# EAGLE board GEMINI (EAGLE 9.4.2)
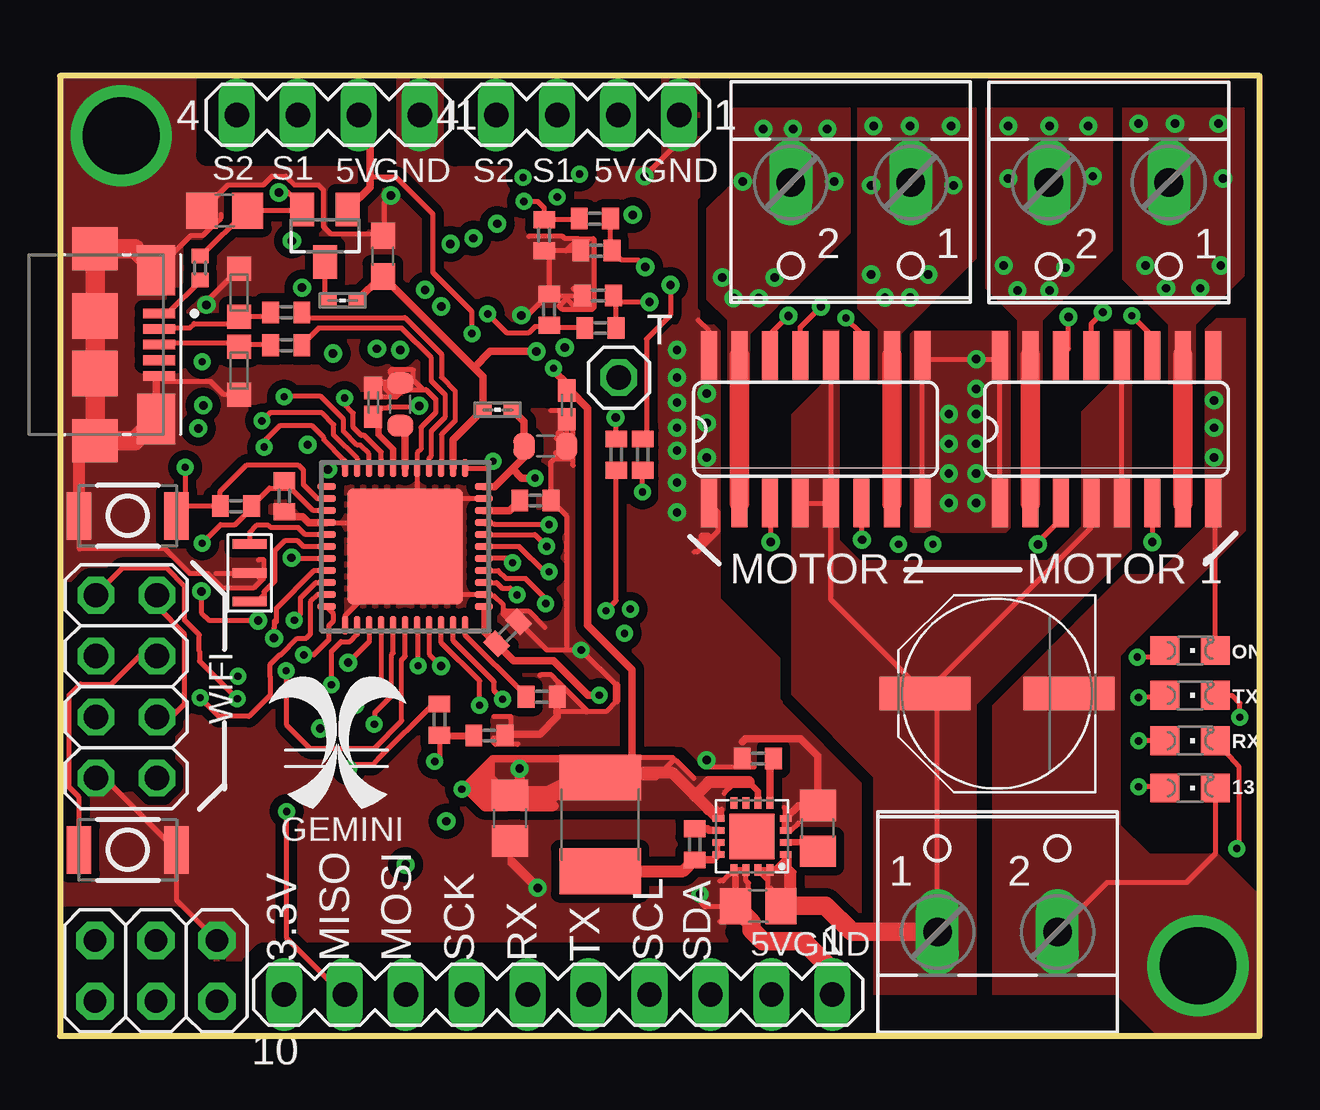
[diagram p0: board, top side]
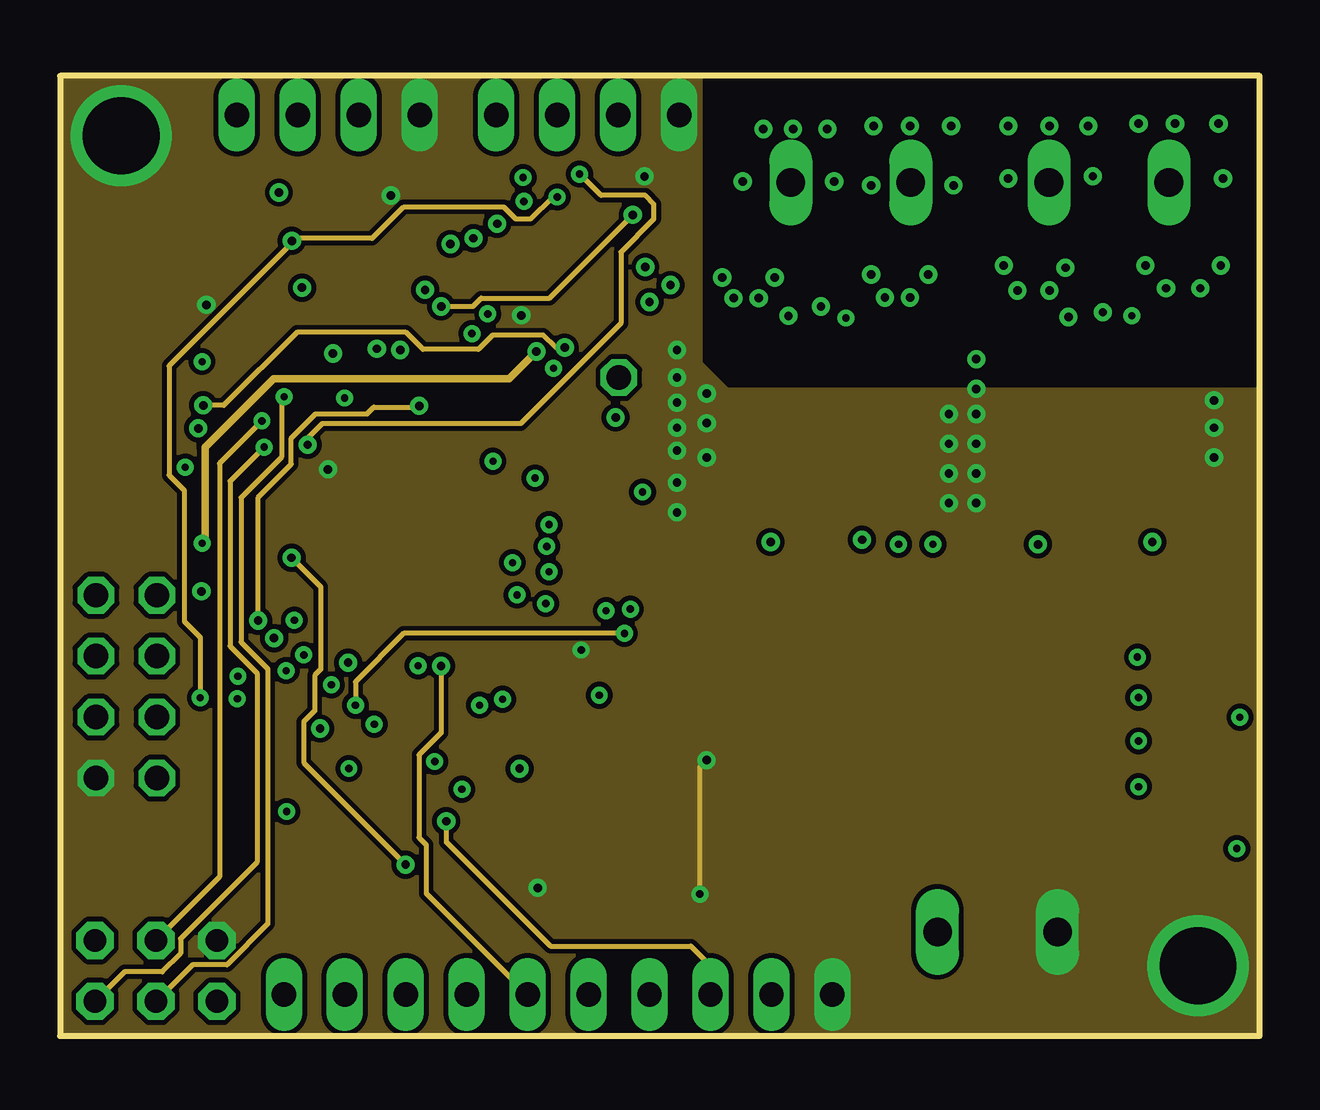
[diagram p1: board, inner layer Route2]
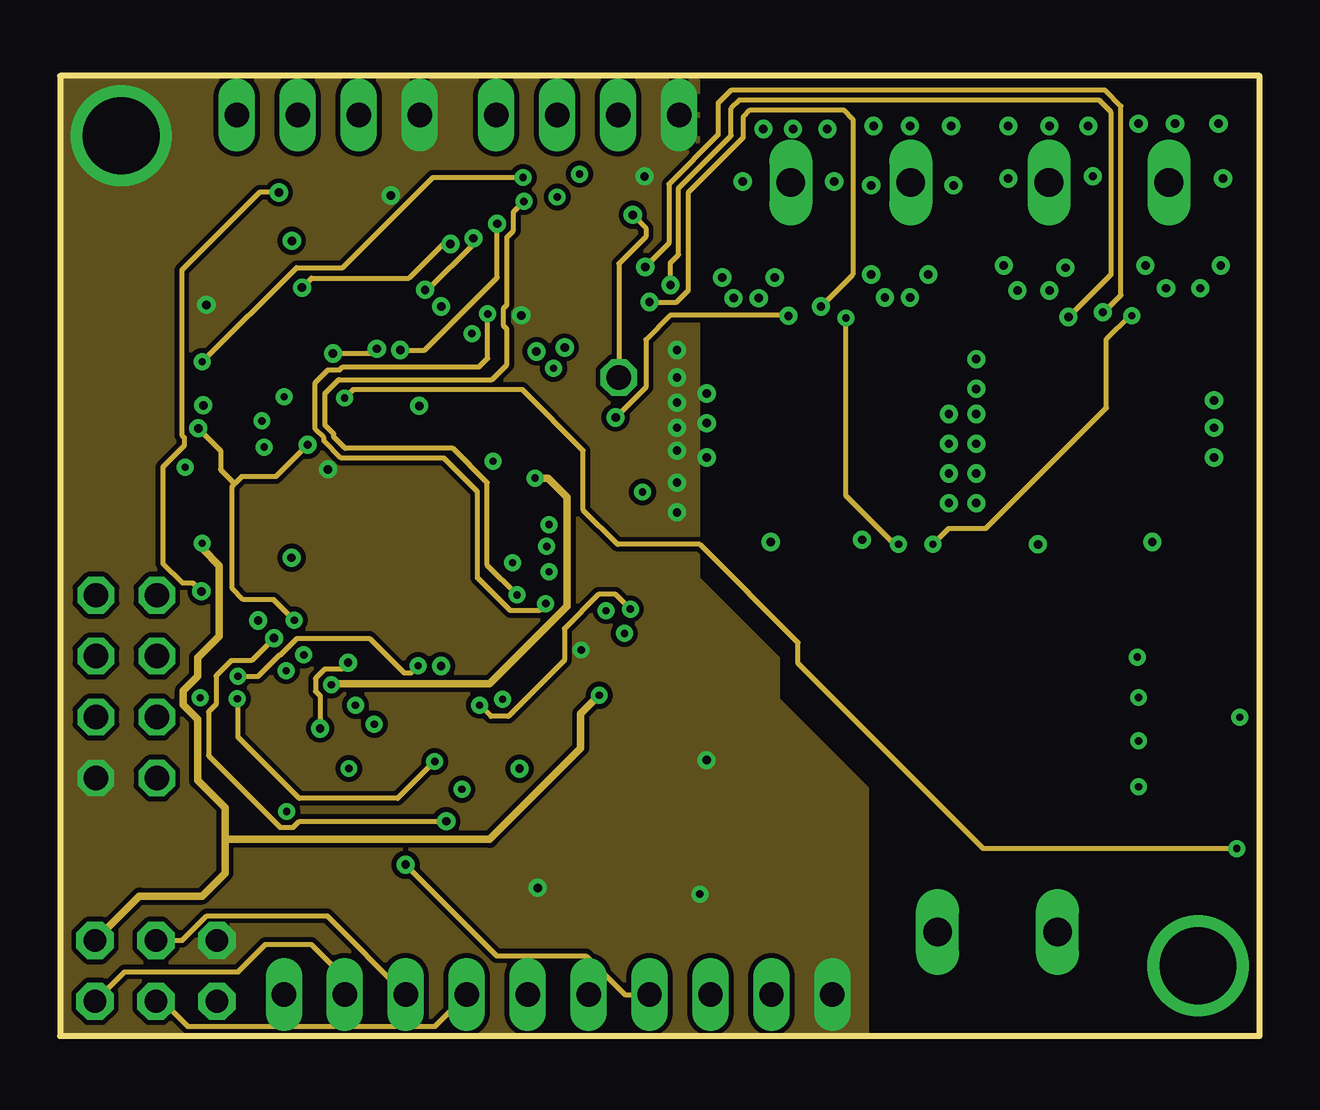
[diagram p2: board, inner layer Route15]
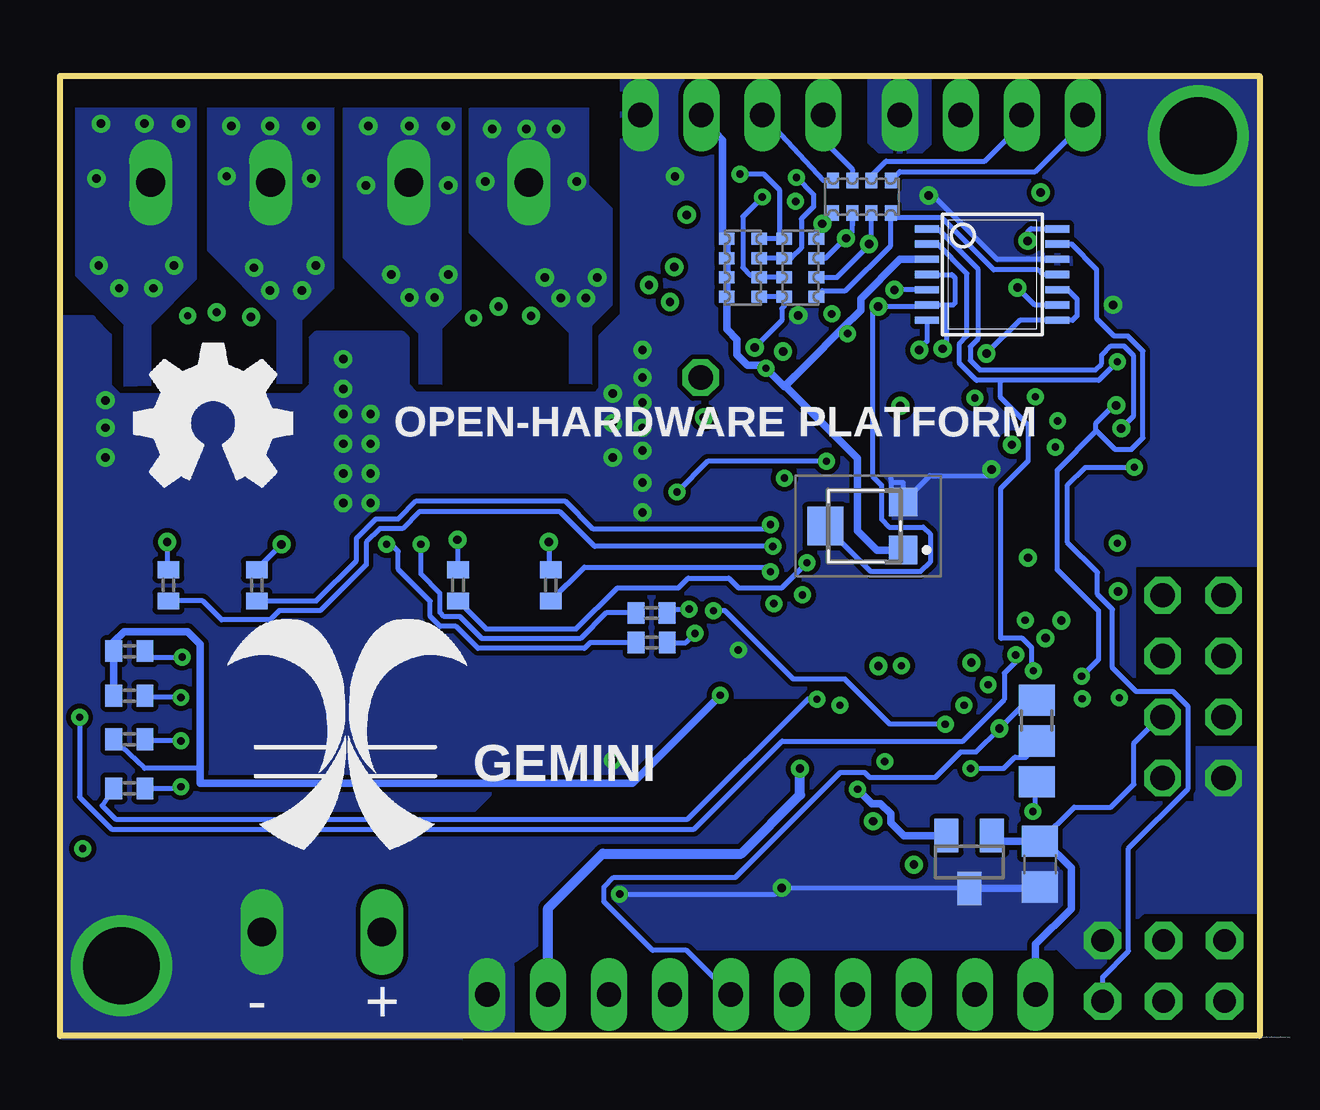
[diagram p3: board, bottom side, seen from below]

Size 50 x 40 mm. Coordinates in mm from the lower left corner, seen from the top.
Outline: 0,0 50,0 50,40 0,40 0,0
Copper layers (1*2+15*16): Top 0.035mm / dielectric 0.213359375mm / Route2 0.035mm / dielectric 1.0161mm / Route15 0.035mm / dielectric 0.213359375mm / Bottom 0.035mm
Design rules "SparkFun-4-layer-PCBWAY-LIMIT *": minimum track width 8mil, minimum drill 0.3mm, track to track 8mil, track to pad 8mil, pad to pad 8mil, via to via 8mil, smd to smd 0mil, copper to edge 0mil, drill to drill 8mil, minimum pad ring 8mil, minimum via ring 8mil, stop-mask expansion 4mil, vias tented up to drill 25mil, thermal gap 0mil
tRestrict: area 28.2,-0.3 to 33.8,5.1; area 6.1,36.7 to 13.6,40.5; area 16.5,36.7 to 24.6,40.3; area 7.9,0.2 to 30.6,3.4; 32 lines
bRestrict: area 0,12.1 to 5.1,19.5; area 2.8,9.8 to 5.1,12.1; 31 lines

## Footprints (pad centres in the part's own frame; a part is rotated, then mirrored left to right if it is on the bottom)
C0603 = smd 1.1 x 1: 1 -0.85,0; 2 0.85,0
C0805 = smd 1.3 x 1.5: 1 -0.95,0; 2 0.95,0
C0402K = smd 0.925 x 0.74: 1 -0.6,0; 2 0.6,0
C0603-ROUND = smd 0.898 x 1.1: 1 -0.889,0; 2 0.889,0
C0402 = smd 0.7 x 0.9: 1 -0.65,0; 2 0.65,0
PANASONIC_E = smd 3.8 x 1.4: + 3,0; - -3,0
SOT23 = smd 1 x 1.4: 1 -0.95,-1.1; 2 0.95,-1.1; 3 0,1.1
2X03 = drill 0.95 pad 1.55 octagon: 1 -2.54,-1.27; 2 -2.54,1.27; 3 0,-1.27; 4 0,1.27; 5 2.54,-1.27; 6 2.54,1.27
HRS_ZX62-B-5PA(33) = smd 0.4 x 1.35: 1 -1.3,2.675; 2 -0.65,2.675; 3 0,2.675; 4 0.65,2.675; 5 1.3,2.675 | smd 2.1 x 1.6: SH1 -3.1,2.55; SH6 3.1,2.55 | smd 1.8 x 1.9: SH2 -4,0; SH5 4,0 | smd 1.9 x 1.9: SH3 -1.2,0; SH4 1.2,0
B0R-JMP = smd 1.5 x 1.3: 1 0,1.7; 2 0,0; 3 0,-1.7
2X04 = drill 1.016 octagon: 1 -3.81,-1.27; 2 -3.81,1.27; 3 -1.27,-1.27; 4 -1.27,1.27; 5 1.27,-1.27; 6 1.27,1.27; 7 3.81,-1.27; 8 3.81,1.27
0402 = smd 0.7 x 0.6: 1 -0.6,0; 2 0.6,0
RCL_L1812 = smd 1.9 x 3.4: 1 -1.95,0; 2 1.95,0
CHIPLED_0805 = smd 1.2 x 1.2: A 0,-1.05; C 0,1.05
TSSOP14 = smd 0.305 x 0.991: 1IN+ 1.905,-2.718; 1IN- 1.27,-2.718; 1OUT -1.905,-2.718; 2IN+ 0.635,-2.718; 2IN- 0,-2.718; 2OUT -1.27,-2.718; 3IN+ 1.27,2.718; 3IN- 1.905,2.718; 3OUT -1.905,2.718; 4IN+ 0,2.718; 4IN- 0.635,2.718; 4OUT -1.27,2.718; GND -0.635,2.718; VCC -0.635,-2.718
W237-102 = drill 1.194 long: 1 -2.5,-1.27; 2 2.5,-1.27
R0402 = smd 0.7 x 0.9: 1 -0.65,0; 2 0.65,0
SMD_157SW = smd 1.016 x 1.981: 1 -2.032,0; 2 2.032,0
CAT16 = smd 0.5 x 0.65: 1 -1.2,-0.675; 2 -0.4,-0.675; 3 0.4,-0.675; 4 1.2,-0.675; 5 1.2,0.675; 6 0.4,0.675; 7 -0.4,0.675; 8 -1.2,0.675
MA04-1 = drill 1.016 long: 1 -3.81,0; 2 -1.27,0; 3 1.27,0; 4 3.81,0
MA10-1 = drill 1.016 long: 1 -11.43,0; 2 -8.89,0; 3 -6.35,0; 4 -3.81,0; 5 -1.27,0; 6 1.27,0; 7 3.81,0; 8 6.35,0; 9 8.89,0; 10 11.43,0
1X01 = drill 1.016 octagon: 1 0,0
QFN44ML7X7 = smd 0.75 x 0.275: 1 -3.275,2.5; 2 -3.275,2; 3 -3.275,1.5; 4 -3.275,1; 5 -3.275,0.5; 6 -3.275,0; 7 -3.275,-0.5; 8 -3.275,-1; 9 -3.275,-1.5; 10 -3.275,-2; 11 -3.275,-2.5; 23 3.275,-2.5; 24 3.275,-2; 25 3.275,-1.5; 26 3.275,-1; 27 3.275,-0.5; 28 3.275,0; 29 3.275,0.5; 30 3.275,1; 31 3.275,1.5; 32 3.275,2; 33 3.275,2.5 | smd 0.275 x 0.75: 12 -2.5,-3.275; 13 -2,-3.275; 14 -1.5,-3.275; 15 -1,-3.275; 16 -0.5,-3.275; 17 0,-3.275; 18 0.5,-3.275; 19 1,-3.275; 20 1.5,-3.275; 21 2,-3.275; 22 2.5,-3.275; 34 2.5,3.275; 35 2,3.275; 36 1.5,3.275; 37 1,3.275; 38 0.5,3.275; 39 0,3.275; 40 -0.5,3.275; 41 -1,3.275; 42 -1.5,3.275; 43 -2,3.275; 44 -2.5,3.275 | smd 4.826 x 4.826: EXP 0,0
RISONATORE = smd 0.4 x 1.4: GND 1,0; IN -0.2,0; OUT 2.2,0
QFN16 = smd 0.483 x 0.279: 1 -1.4,0.75; 2 -1.4,0.25; 3 -1.4,-0.25; 4 -1.4,-0.75; 9 1.4,-0.75; 10 1.4,-0.25; 11 1.4,0.25; 12 1.4,0.75 | smd 0.279 x 0.483: 5 -0.75,-1.4; 6 -0.25,-1.4; 7 0.25,-1.4; 8 0.75,-1.4; 13 0.75,1.4; 14 0.25,1.4; 15 -0.25,1.4; 16 -0.75,1.4 | smd 1.88 x 1.88: EXP 0,0
R0402' = smd 0.6 x 0.7: 1 -0.5,0; 2 0.5,0
SO16 = smd 0.66 x 2.032: 1 -4.445,-3.073; 2 -3.175,-3.073; 3 -1.905,-3.073; 4 -0.635,-3.073; 5 0.635,-3.073; 6 1.905,-3.073; 7 3.175,-3.073; 8 4.445,-3.073; 9 4.445,3.073; 10 3.175,3.073; 11 1.905,3.073; 12 0.635,3.073; 13 -0.635,3.073; 14 -1.905,3.073; 15 -3.175,3.073; 16 -4.445,3.073
35WR100KLFTR = smd 1.2 x 1.2: 1 -1.625,1; 3 -1.625,-1 | smd 1.5 x 1.6: 2 1.625,0
CT/CN0603 = smd 1 x 1: 1 -1,0; 2 1,0

## Placement (x,y rotation side)
C1  2.2uF  [C0603]  13.46,32.49 90 top
C2  10uF  [C0805]  6.87,34.39 180 top
C3  100n  [C0402K]  21.13,26.29 90 top
C4  10uF  [C0805]  9.15,7.15 270 bottom
C5  1uF  [C0603-ROUND]  20.24,24.57 0 top
C6  100n  [C0402]  19.81,22.31 180 top
C7  1uF  [C0603-ROUND]  14.18,26.31 90 top
C8  100n  [C0402]  18.66,16.79 45 top
C9  10n  [C0402]  20.18,33.36 90 top
C10  10n  [C0402]  20.39,30.26 270 top
C11  100n  [C0402]  9.35,22.49 270 top
C12  [PANASONIC_E]  39.05,14.26 180 top
C13  100n  [C0402K]  13.06,26.39 270 top
C36  2.2uF  [C0805]  29.1,5.4 180 top
C37  0.1uF  [C0402]  26.45,7.98 90 top
C38  22uF  [C0805]  18.76,9.07 270 top
C39  5600pF  [C0402]  29.09,11.55 180 top
C40  2.2uF  [C0805]  31.59,8.64 90 top
D3  SDM40E20LC-7  [SOT23]  11.05,33.34 180 top
ICSP  ICSP  [2X03]  4,2.71 0 top
J1  ZX62-B-5PA(33)  [HRS_ZX62-B-5PA(33)]  1.46,28.8 270 top
JMP1  0R-JUMPB  [B0R-JMP]  9.29,12.28 180 bottom
JP5  [2X04]  2.77,14.55 270 top
L1  MPZ1005A331ETD25  [0402]  18.24,26.09 0 top
L2  MPZ1005A331ETD25  [0402]  11.78,30.64 0 top
L8  10uH  [RCL_L1812]  22.51,8.81 270 top
LED  BLUE  [CHIPLED_0805]  47.1,10.33 270 top
LM2901AQT14-13  LM390  [TSSOP14]  11.14,31.72 270 bottom
MOT1  [W237-102]  43.72,34.28 180 top
MOT2  [W237-102]  32.96,34.29 180 top
ON  Green  [CHIPLED_0805]  47.1,16.05 270 top
POWER  [W237-102]  39.08,5.6 0 top
R1  1k  [R0402]  47.1,10.31 0 bottom
R2  1k  [R0402]  15.82,13.18 270 top
R3  1k  [R0402]  47.1,16.03 0 bottom
R4  10k  [R0402]  7.34,22.07 0 top
R5  690  [R0402]  20.08,14.13 180 top
R6  1k  [R0402]  47.1,12.36 0 bottom
R7  1k  [R0402]  47.1,14.17 0 bottom
R8  2k  [R0402]  17.9,12.51 0 top
R9  22  [R0402]  9.44,30.14 0 top
R10  22  [R0402]  9.44,28.77 0 top
R20  1k  [R0402]  25.34,16.38 180 bottom
R21  10k  [R0402]  22.3,34.05 0 top
R22  1k  [R0402]  24.3,24.22 90 top
R23  4k  [R0402]  22.36,32.72 0 top
R24  1k  [R0402]  45.48,18.77 270 bottom
R25  1k  [R0402]  41.8,18.77 270 bottom
R26  1k  [R0402]  25.34,17.62 180 bottom
R27  10k  [R0402]  22.52,29.5 0 top
R28  1k  [R0402]  23.18,24.22 90 top
R29  4k  [R0402]  22.43,30.84 0 top
R30  1k  [R0402]  33.41,18.77 270 bottom
R31  1k  [R0402]  29.55,18.77 270 bottom
RESET  [SMD_157SW]  2.83,21.67 180 top
RESET1  [SMD_157SW]  2.83,7.75 0 top
RN1  10k  [CAT16]  16.57,34.96 0 bottom
RN2  3k  [CAT16]  21.53,32 270 bottom
RN3  10M  [CAT16]  19.15,32 90 bottom
RX  Yellow  [CHIPLED_0805]  47.1,12.3 270 top
SV1  [MA04-1]  11.18,38.37 180 top
SV2  [MA04-1]  22,38.37 180 top
SV3  [MA10-1]  20.76,1.71 180 top
T  [1X01]  23.3,27.43 0 top
TX  Yellow  [CHIPLED_0805]  47.1,14.19 270 top
U1  ATMEGA32U4-XUMU  [QFN44ML7X7]  14.39,20.38 270 top
U$1  RISONATORE  [RISONATORE]  7.91,18.29 90 top
U$3  MAX17632B  [QFN16]  28.85,8.31 180 top
U$5  MCP1812BT-3.3  [SOT23]  12.1,7.24 180 bottom
U$6  F0402E0R50FSTR  [R0402']  5.84,32 90 top
U$29  VNH7070  [SO16]  43.62,25.27 0 top
U$32  VNH7070  [SO16]  31.5,25.27 0 top
VR1  35WR10KLFTR  [35WR100KLFTR]  16.48,21.24 180 bottom
Z1  CG0603MLC-05E  [CT/CN0603]  7.47,27.72 270 top
Z2  CG0603MLC-05E  [CT/CN0603]  7.47,30.96 90 top

## Library data of the parts
C1-C4 C6 C8 C11-C13 C36-C40 = rcl; SPICEPREFIX: C
C5 C7 ICSP RESET RESET1 U1 = SmartPrj
C9 C10 = eagle-ltspice; SPICEMODEL: NONE; SPICEPREFIX: C
D3 = diode
J1 = MICROUSB; AVAILABILITY: Unavailable; DESCRIPTION: ZX Series 5 Position Right Angle PCB Wire Micro B USB Plug; MF: Hirose; MP: ZX62-B-5PA_33_; PACKAGE: None; PRICE: None
JMP1 = jump-0r-smd
JP5 T = pinhead
L1 L2 = wuerth-elektronik
L8 = ZYON-TOXIC-5.0
LED ON RX TX = led
LM2901AQT14-13 = ds1803
MOT1 MOT2 POWER = con-wago-500; MPN: 237-102; OC_FARNELL: unknown; OC_NEWARK: 70K9898
R1-R10 R20-R31 = eagle-ltspice; SPICEMODEL: NONE; SPICEPREFIX: R
RN1-RN3 = resistor-dil; OC_FARNELL: unknown; OC_NEWARK: unknown
SV1-SV3 = con-lstb; OC_FARNELL: unknown; OC_NEWARK: unknown
U$1 = risonatore
U$3 = fixes
U$5 = ldo
U$6 = FUSE
U$29 U$32 = VNH7070
VR1 = SamacSys_Parts; DESCRIPTION: BI TECHNOLOGIES / TT ELECTRONICS - 35WR10KLFTR - TRIMMER CERMET, 3MM 10K; HEIGHT: 1.8mm; MANUFACTURER_NAME: BI Technologies; MANUFACTURER_PART_NUMBER: 35WR10KLFTR; MOUSER_PART_NUMBER: 858-35WR10KLFTR; MOUSER_PRICE-STOCK: https://www.mouser.com/Search/Refine.aspx?Keyword=858-35WR10KLFTR
Z1 Z2 = varistor

## Nets
+3V3: C4.1 JP5.2 JP5.6 SV3.10 U$5.1
+5V [POWER]: C3.2 C38.1 D3.1 L8.1 LM2901AQT14-13.VCC RN2.1 RN2.2 RN2.3 RN2.4 SV1.2 SV2.2 SV3.2 U$3.6 U$3.9 U$5.2 VR1.1
+5VP [POWER]: C1.1 C8.1 C11.1 ICSP.2 L1.1 L2.2 R3.1 R4.2 R6.1 R7.1 U1.2 U1.14 U1.34
AREF [POWER]: C6.2 U1.42
AVCC: C5.1 L1.2 U1.24 U1.44
D+: J1.3 R10.1 Z1.1
D-: J1.2 R9.1 Z2.1
E1I: RN1.8 SV2.3
E1M: LM2901AQT14-13.1OUT RN2.8 RN3.5 U1.20
E2I: RN1.7 SV2.4
E2M: LM2901AQT14-13.2OUT RN2.7 RN3.6 U1.28
E3I: RN1.6 SV1.3
E3M: LM2901AQT14-13.3OUT RN2.6 RN3.7 U1.21
E4I: RN1.5 SV1.4
E4M: LM2901AQT14-13.4OUT RN2.5 RN3.8 U1.29
GND: C1.2 C2.2 C3.1 C4.2 C5.2 C6.1 C7.2 C8.2 C9.1 C10.1 C11.2 C12.- C13.1 C36.2 C38.2 C39.2 C40.2 ICSP.6 J1.5 J1.SH1 J1.SH2 J1.SH3 J1.SH4 J1.SH5 J1.SH6 JP5.7 LED.C LM2901AQT14-13.GND ON.C POWER.2 R5.1 R8.2 R23.1 R29.1 RESET1.2 RESET.2 SV1.1 SV2.1 SV3.1 U1.5 U1.15 U1.23 U1.35 U1.43 U1.EXP U$1.GND U$3.3 U$3.4 U$3.13 U$3.14 U$5.3 U$29.1 U$29.8 U$29.9 U$29.16 U$32.1 U$32.8 U$32.9 U$32.16 VR1.3 Z1.2 Z2.2
HWB: R5.2 U1.33
M1_CS: C9.2 R21.1 U1.36
M1_INA: R24.2 U1.40
M1_INB: R25.2 U1.41
M1_PWM: R20.1 U1.26
M1_SEL: R22.1 U1.1
M2_CS: C10.2 R27.1 U1.37
M2_INA: R30.2 U1.38
M2_INB: R31.2 U1.39
M2_PWM: R26.1 U1.31
M2_SEL: R28.1 U1.27
MISO: ICSP.1 JMP1.1 SV3.9 U1.11
MOSI: ICSP.4 SV3.8 U1.10
MOT1_A: MOT1.1 U$29.7 U$29.10
MOT1_B: MOT1.2 U$29.2 U$29.15
MOT2_A: MOT2.1 U$32.7 U$32.10
MOT2_B: MOT2.2 U$32.2 U$32.15
N$1: LED.A R1.2
N$2: LM2901AQT14-13.3IN+ RN1.3 RN3.2
N$3: LM2901AQT14-13.4IN+ RN1.4 RN3.1
N$4: ON.A R3.2
N$5: R6.2 RX.A
N$6: R7.2 TX.A
N$7: R21.2 R23.2 U$29.13
N$8: R22.2 U$29.14
N$9: R20.2 U$29.11
N$10: R24.1 U$29.6
N$11: R25.1 U$29.3
N$12: R27.2 R29.2 U$32.13
N$13: R28.2 U$32.14
N$14: R26.2 U$32.11
N$15: R30.1 U$32.6
N$16: R31.1 U$32.3
N$17: C37.2 U$3.10
N$18: C37.1 L8.2 U$3.11 U$3.12
N$19: C39.1 U$3.5
N$20: C40.1 U$3.2
N$21: R1.1 U1.32
N$22: LM2901AQT14-13.1IN- LM2901AQT14-13.2IN- LM2901AQT14-13.3IN- LM2901AQT14-13.4IN- T.1 VR1.2
N$23: D3.3 L2.1
N$24: JP5.1 R2.2 R8.1
N$25: JMP1.2 R2.1
N$27: LM2901AQT14-13.2IN+ RN1.2 RN3.3
N$28: LM2901AQT14-13.1IN+ RN1.1 RN3.4
N$29: U1.17 U$1.IN
N$30: U1.16 U$1.OUT
RD+: R10.2 U1.4
RD-: R9.2 U1.3
RESET: ICSP.5 R4.1 RESET.1 U1.13
RESET-WIFI: JP5.4 RESET1.1
RX: SV3.6 U1.30
RXLED: RX.C U1.8
SCK: ICSP.3 SV3.7 U1.9
SCL: SV3.4 U1.18
SDA: SV3.3 U1.19
TX: JMP1.3 SV3.5 U1.25
TXLED: TX.C U1.22
UCAP: C7.1 U1.6
USBID: J1.4
VIN [POWER]: C12.+ C36.1 POWER.1 U$3.1 U$3.15 U$3.16 U$29.4 U$29.5 U$29.12 U$32.4 U$32.5 U$32.12
VUSB: C2.1 C13.2 D3.2 U1.7 U$6.2
WIFI-RX: JP5.8
WIFI_RX: U1.12
XUSB: J1.1 U$6.1

## Tracks (layer width: path | path; a pad name or v marks a point on that pad's centre or on a via)
+3V3
  Top 0.203: JP5.6 4.64,13.28 5.17,13.81 5.17,16.76 4.05,17.89 4.04,17.88 JP5.2
  Bottom 0.203: C4.1 7.73,9.53 6.19,9.53 5.24,10.48 5.24,12.19 4.15,13.28 JP5.6
  Bottom 0.305: U$5.1 10.91,8.1 C4.1 8.96,8.1 7.85,7 7.85,5.29 9.34,3.81 SV3.10
+5V  (via drill 0.3, 0.35)
  Top 0.203: 12.93,35.76 14.02,35.76 15.54,34.24 15.54,31.8 17.17,30.18 v17.17,29.26 | C38.1 18.76,9.58 18.65,9.47 17.94,9.47 | U$3.9 27.43,9.04 27.28,9.04 26.99,9.33 | U$3.9 27.57,9.18 27.59,9.18 27.59,9.46 | 28.38,10.57 28.25,10.45 28.02,10.45 27.68,10.1 | L8.1 24.85,10.76 25.57,11.48 25.67,11.48 26.42,10.72 | L8.1 22.51,11.15 22.32,10.96 | 27.39,9.48 27.39,9.06 U$3.9 | L8.1 22.87,10.76 23.71,11.6 25.54,11.6 | 17.44,9.69 16.87,10.27 v16.75,10.27 17.34,10.27 | 17.44,9.69 17.55,9.59 | 17.55,9.59 17.67,9.47 17.79,9.47 | 17.79,9.47 17.94,9.47 | 17.94,9.47 17.94,9.92 | 17.94,9.92 17.94,10.1 18.02,10.02 | 17.55,10.47 17.65,10.37 17.89,10.13 18.03,10.13 18.03,10.01 18.02,10.02 | C38.1 17.77,10.02 17.44,9.69 | 17.55,9.59 17.61,9.59 17.79,9.77 | 17.79,9.47 17.79,9.77 | 17.79,9.77 17.94,9.92 | C38.1 18.02,10.02
  Top 0.279: U$3.9 27.43,9.06 27.05,9.43 | U$3.6 | U$3.6 29.1,10.18 28.71,10.57
  Top 0.305: D3.1 12.93,35.37 12.93,35.76 12.93,37.9 SV1.2 | 25.53,10.95 23.52,10.95 | v20.57,27.81 20.57,27.72 21.13,27.17 C3.2 21.26,26.89 22,26.15 22,17.1 23.85,15.25 23.85,11.47 23.14,10.76 L8.1 21.72,11.55 18.04,11.55 17.96,11.48 | 17.96,11.48 17.79,11.31 | 17.79,11.31 17.55,11.07 | v16.75,10.27 17.55,11.07 | 17.55,11.07 17.67,11.07 17.96,10.78 | 17.96,10.78 18.29,10.45 | 17.79,11.31 17.96,11.14 | 17.96,11.14 17.96,10.78 | 17.96,11.48 17.96,11.14
  Top 0.406: v19.16,11.13 19.16,10.41 C38.1 19.2,9.57 20.58,9.57
  Top 0.508: 27.05,9.43 26.48,10 | 26.48,10 25.53,10.95 22.71,10.95 L8.1 | 28.71,10.57 28.38,10.57 27.05,10.57 26.48,10
  Top 0.762: 22.41,11.06 20.35,10.02 C38.1
  Top 0.889: 17.34,10.27 17.55,10.47 | 17.65,10.37 17.71,10.44
  Bottom 0.203: RN2.3 22.25,31.6 RN2.3 | RN2.2 22.25,32.41 RN2.2 | 17.39,29.48 v17.17,29.26
  Bottom 0.305: SV2.2 22.38,37.32 22.38,33.38 RN2.1 RN2.2 RN2.3 RN2.4 22.2,29.44 21.77,29.01 21.77,28.38 21.34,27.95 20.71,27.95 v20.57,27.81 19.81,27.05 18.89,27.97 | VR1.1 15.95,20.24 16.76,21.04 16.76,24.06 19.78,27.09 18.89,27.97 | LM2901AQT14-13.VCC 14.98,32.35 16.62,30.71 16.62,30.24 17.39,29.48 18.89,27.97 | U$5.2 14.82,8.34 15.37,8.88 15.37,9.24 15.8,9.67 16.16,9.67 v16.75,10.27
  Bottom 0.406: SV3.2 29.65,5.32 27.39,7.59 21.59,7.59 19.16,10.03 v19.16,11.13
  pour Top: 27.68,9.47 18.11,9.47 18.11,11.58 25.54,11.58 26.4,10.72 27.71,10.72 27.71,9.49
+5VP  (via drill 0.3, 0.35)
  Top 0.203: 17.72,17.83 U1.34 | v5.93,20.53 6.7,21.3 7.31,21.3 8.05,22.04 8.05,22.07 R4.2 8.73,22.82 9.6,22.82 | U1.14 10.55,21.88 9.62,22.82 9.6,22.82 | 9.6,22.82 9.41,23 9.35,23
  Top 0.305: 9.35,23 C11.1 | L2.2 13.38,31.64 C1.1 17.26,27.84 | 17.26,27.84 17.64,27.46 L1.1 16.39,24.83 U1.2 | v22.48,14.19 22,14.19 20.58,15.62 18.91,15.62 C8.1 17.72,16.81 17.72,17.83 | v19.86,28.52 17.93,28.52 17.26,27.84
  Route2 0.305: v5.93,20.53 6.05,20.65 6.05,24.52 8.92,27.38 18.73,27.38 v19.86,28.52
  Route15 0.203: 5.94,20.52 v5.93,20.53
  Route15 0.305: ICSP.2 3.31,5.82 5.92,5.82 6.88,6.78 6.88,8.11 | v22.48,14.19 21.71,13.42 21.71,11.98 17.91,8.19 6.95,8.19 6.88,8.11 | 5.94,20.52 5.94,20.3 6.64,19.59 6.64,16.66 5.74,15.76 5.74,14.98 5.14,14.38 5.14,13.79 5.74,13.19 5.74,10.64 6.88,9.51 6.88,8.3 6.88,8.11
  Bottom 0.203: 47.74,16.01 R3.1 | 44.15,11.14 46.47,11.14 R6.1
  Bottom 0.305: R7.1 47.75,15.74 47.74,16.01 | R3.1 47.75,16.42 47.33,16.85 44.69,16.85 44.15,16.31 44.15,11.14 44.15,10.53 26.14,10.53 v22.48,14.19
AREF
  Top 0.305: C6.2 18.74,21.88 U1.42
AVCC  (via drill 0.3)
  Top 0.203: v11.31,14.62 11.31,16.03 11.71,16.43 12.09,16.43 12.39,16.73 U1.24
  Top 0.305: U1.44 18.12,22.88 18.86,23.62 | 18.86,23.62 19.35,24.11 C5.1 19.35,25.58 L1.2 | v19.8,23.24 19.24,23.24 18.86,23.62
  Route15 0.305: v11.31,14.62 11.35,14.66 17.9,14.66 21.14,17.91 21.14,22.44 20.34,23.24 v19.8,23.24
D+
  Top 0.203: R10.1 8.76,28.8 7.55,28.8 Z1.1 7.33,28.87 4.2,28.87 J1.3
D-
  Top 0.203: R9.1 8.6,29.96 Z2.1 7.19,29.67 5.59,29.67 5.41,29.5 4.18,29.5 J1.2
E1I
  Bottom 0.203: RN1.8 18.19,35.63 SV2.3
E1M  (via drill 0.3, 0.35)
  Top 0.203: 11.07,18.9 U1.20 10.66,18.88 10.03,18.25 10.03,17.58 v9.77,17.32
  Route2 0.203: v21.66,35.91 21.67,35.91 22.56,35.02 24.4,35.02 24.76,34.66 24.76,34.03 23.38,32.66 23.38,29.69 19.2,25.51 10.93,25.51 10.32,24.9 v10.32,24.63
  Route15 0.203: v10.32,24.63 9,23.3 7.57,23.3 7.28,23.01 | 7.28,23.01 7.18,22.91 7.18,18.64 7.64,18.18 8.91,18.18 v9.77,17.32 | v5.76,25.31 6.7,24.38 6.7,23.59 7.28,23.01
  Bottom 0.203: RN2.8 RN3.5 20.02,33.22 20.02,35.26 20.67,35.91 v21.65,35.91 v21.66,35.91 | LM2901AQT14-13.1OUT 13.85,33.64 13.41,33.64 11.75,31.97 11.75,29.03 12.06,28.71 12.06,28.15 11.66,27.75 6.84,27.75 6.58,28.01 6.58,28.36 6.19,28.75 5.65,28.75 5.26,28.36 5.26,25.81 v5.76,25.31 | 9.76,17.31 v9.77,17.32
E2I
  Bottom 0.203: SV2.4 18.19,37.31 16.97,36.1 RN1.7
E2M  (via drill 0.3)
  Top 0.203: U1.28 14.39,15.82 14.25,15.67 14.25,13.13 13.11,11.99 10.41,11.99 9.44,12.96 9.44,15.21 v9.43,15.22
  Route15 0.203: v19.3,35.76 15.54,35.76 11.79,32 9.86,32 5.93,28.08 v5.93,28.09 v5.92,28.09 | v5.92,28.09
  Bottom 0.203: RN2.7 RN3.6 19.51,32.41 19.1,32.82 19.1,34.04 18.59,34.54 18.59,35.05 v19.3,35.76 | LM2901AQT14-13.2OUT 13.43,33 12.19,31.76 12.19,29.16 12.51,28.84 12.51,28.02 11.8,27.31 10.75,27.31 | v5.92,28.09 6.71,27.31 10.75,27.31 | v9.43,15.22 9.49,15.28 9.49,16.17 9.88,16.56 10.77,16.56 10.79,16.58 10.79,22.81 9.64,23.95 9.64,25.45 10.8,26.6 10.8,27.26 10.75,27.31
E3I
  Bottom 0.203: RN1.6 16.17,35.84 15.56,36.45 11.46,36.45 9.91,37.99 SV1.3
E3M  (via drill 0.3, 0.35)
  Top 0.203: v5.85,14.09 6.62,13.31 7.88,13.31 8.77,14.2 8.77,14.94 8.77,15.49 9.15,15.88 9.21,15.88 9.89,16.56 10.26,16.56 10.43,16.73 10.43,18.08 10.74,18.39 U1.21
  Route2 0.203: v20.73,34.95 20.52,34.95 19.61,34.04 19,34.04 18.49,34.54 14.33,34.54 13.01,33.22 9.77,33.22 v9.66,33.12 9.75,33.12 4.55,27.92 4.55,23.36 5.18,22.73 5.18,17.27 5.85,16.61 v5.85,14.09
  Bottom 0.203: RN3.7 RN2.6 20.93,31.7 21.23,31.7 21.54,32 21.54,34.14 v20.73,34.95 | LM2901AQT14-13.3OUT 8.44,33.64 9.52,33.64 9.66,33.49 v9.66,33.12
E4I
  Bottom 0.203: RN1.5 14.99,36.01 9.35,36.01 7.37,37.99 SV1.4
E4M  (via drill 0.3, 0.35)
  Top 0.203: v14.93,15.42 14.9,15.45 U1.29
  Route2 0.203: v21.04,28.68 20.66,28.68 20.14,29.2 18.04,29.2 17.44,28.6 15.13,28.6 14.42,29.31 9.88,29.31 6.83,26.27 v5.97,26.27
  Route15 0.203: v14.93,15.42 14.63,15.13 14.34,15.13 12.9,16.56 9.88,16.56 9.2,15.88 9.15,15.88 8.26,14.98 v7.42,14.98 | v7.42,14.98
  Bottom 0.203: RN2.5 RN3.8 19.82,30.39 19.91,30.3 19.91,29.81 v21.04,28.68 | v7.42,14.98 6.72,15.68 6.72,17.71 8.43,19.43 8.43,23.57 6.8,25.2 | LM2901AQT14-13.4OUT 7.85,32.99 6.78,31.92 6.78,29.89 6.05,29.16 5.48,29.16 4.86,28.53 4.86,24.91 5.33,24.44 6.03,24.44 6.8,25.2 | 6.8,25.2 6.82,25.23 6.82,25.53 6.08,26.27 v5.97,26.27
GND  (via drill 0.3, 0.35, 3.2)
  Top 0.203: 14.89,22.22 U1.5 14.89,24.29 15.04,24.45 15.04,25.35 15.66,25.96 15.66,26.53 15.26,26.93 15.14,26.93 | 14.89,22.22 14.86,22.19 | 16,18.38 U1.35 17.72,18.32 18.1,18.32 18.48,17.95 18.48,17.57 18.8,17.25 C8.2 | 16,18.38 | U1.23 11.89,17.51 12.95,18.57 13.01,18.59 13.01,19 14.33,20.32 U1.EXP | U1.15 12.72,21.38 | 12.72,21.38 12.76,21.34 | U1.43 16.1,22.38 16.05,22.35 14.94,22.35 U1.EXP | C5.2 20.46,23.9 C6.1 20.52,22.25 21.13,21.64 21.13,16.08 | C5.2 C3.1 | J1.SH1 5.46,33.34 5.96,33.34 6.32,33.71 5.92,34.1 C2.2 | Z1.2 6.83,26.72 6.29,27.25 4.38,27.25 J1.5 | 0.8,24.13 J1.SH5 | 6.5,19.25 7.87,19.25 U$1.GND 8.11,19.29 8.4,18.99 | RESET.2 0.8,20.34 0.81,20.29 4.38,20.29 5.42,19.25 6.18,19.25 6.79,18.65 8.07,18.65 8.4,18.99 | 28.22,5.4 C36.2 | ON.C 48.15,22.11 U$29.8 | JP5.7 1.74,10.49 2.09,10.49 4.83,7.75 RESET1.2 4.86,5.65 ICSP.6 | C8.2 20.29,16.08 21.13,16.08 | 21.13,16.08 v21.73,16.08 21.74,16.05 23.2,14.6 | U$32.8 35.94,28.17 | 35.94,28.17 U$32.9 | U$29.1 U$29.16 39,28.17 35.94,28.17 | R23.1 21.7,32.71 21.08,32.71 | 21.08,32.71 C9.1 20.39,32.5 C10.1 | R29.1 20.46,30.84 C10.1 | SV2.1 25.81,37.25 v24.36,35.81 | 14.99,38.08 SV1.1 | v26.95,11.48 26.95,11.19 28.94,11.19 28.58,11.55 C39.2 | v19.91,6.17 18.76,7.32 C38.2 18.76,8.26 | 12.72,21.38 12.8,21.34 14.02,20.12 U1.EXP | 14.89,22.22 14.94,22.25 U1.EXP | v13.79,35.01 13.72,34.95 13.51,34.75 13.51,33.43 C1.2 13.41,33.43 11.28,33.43 10.97,33.73 10.97,35.26 10.77,35.46 9.77,35.46 9.41,35.82 8.84,35.82 8.48,35.46 7.01,35.46 5.99,34.44 C2.2 | J1.SH4 1.52,27.64 1.46,27.64 | J1.SH3 1.52,30.07 1.46,30.07 | 20.73,13.51 22.76,13.51 23.2,13.95 | U1.EXP 14.22,20.12 15.95,18.39 16,18.38
  Top 0.203: C10.1 19.49,30.02 v19.23,30.02 | Z2.2 6.1,30.58 v6.1,30.45 | 14.39,27 C7.2 13.78,27.6 13.78,27.74 14.72,27.74 14.72,27.34 15.14,26.93 | 14.39,27 14.46,26.93 15.14,26.93 | POWER.2 43.63,6.38 46.96,6.38 48.15,7.58 LED.C | C36.2 27.5,4.76 | C36.2 28.15,5.58 28.7,6.13 28.7,6.37 28.6,6.47 U$3.14 | U$3.13 27.64,6.45 27.51,6.45 | 30.19,9.51 30.25,9.46 U$3.3 30.37,8.56 30.39,8.54 30.45,8.54 30.78,8.87 | 18.06,12.23 18.15,12.14 19.07,12.14 19.09,12.16 19.07,12.17 18.28,12.17 18.18,12.27 18.18,12.4 18.05,12.4 18.05,12.24 18.13,12.16 18.2,12.16 R8.2 18.55,12.65 18.8,12.9 18.8,13.3 18.09,13.3 | R5.1 20.73,14.27 20.99,14.53 20.77,14.75 | 20.77,14.75 20.48,15.04 20.02,15.04 20,15.01 | 20.77,14.75 20.77,14.62 20.72,14.57 20.8,14.5 21.02,14.5 21.95,13.57 21.95,13.49 | U$32.1 27.43,21.83 27.43,21.02 26.85,20.45 | 26.85,20.45 26.58,20.45 26.58,20.62 26.82,20.62 27.04,20.84 27.04,20.85 26.72,20.85 26.72,20.74 | 26.85,20.45 26.57,20.17 26.43,20.17 | C5.2 21.39,24.84 21.39,25.3 | C3.1 21.13,25.47 20.77,25.11 20.77,24.94 20.71,24.87 20.7,24.88 20.7,24.9 20.91,25.11 | C5.2 20.86,24.3 20.66,24.3 20.66,24.08 20.7,24.04 21.35,24.04 21.35,24.05 21.34,24.07 | C5.2 21.39,24.31 21.39,23.75 | C3.1 20.77,26.05 20.45,26.05 | 21.08,32.71 21.58,33.21 | 21.58,33.21 22.22,33.21 22.27,33.17 22.27,30.36 22.16,30.26 20.95,30.26 20.8,30.4 21.09,30.68 21.14,30.68 21.48,30.34 22.12,30.34 22.15,30.38 | 22.15,30.38 | 22.15,30.38 21.39,31.13 | 21.58,33.21 21.05,33.21 20.95,33.31 19.54,33.31 | U$32.16 27.05,29.37 26.59,29.82 | 26.89,5.4 C36.2 | C8.2 19.02,17.25 18.57,17.7 19.52,17.7 20.2,17.02 | 8.26,19.83 8.5,19.83 8.5,19.09 8.4,18.99
  Top 0.203: C13.1 13.42,26.63 13.91,26.63 | 14.39,27 14.01,26.63 | 13.91,26.63 14.01,26.63 | 14.01,26.63 13.71,26.93 13.71,27.2 | 13.91,26.63 13.56,26.97 13.56,27.2 | C2.2 6.45,33.85 6.5,33.85 6.71,34.07 6.71,34.21
  Top 0.279: U$3.14 U$3.13 28.15,6.85 C36.2 | C13.1 13.27,27.2 13.56,27.2 13.71,27.2 C7.2 | 26.89,5.4 26.67,5.62 v26.67,5.91
  Top 0.305: U$3.3 U$3.4 30.78,9.59 C40.2 31.59,11.66 30.86,12.38 28.57,12.38 28.44,12.25 | J1.SH6 4.01,27.37 J1.5 | R8.2 18.61,12.57 20,12.57 20.73,13.3 20.73,13.51 R5.1 | 23.2,14.6 23.2,13.95 | C11.2 9.56,21.63 10.12,21.63 10.37,21.38 U1.15
  Top 0.406: v19.91,6.17 18.86,7.21
  Top 0.508: RESET.2 0.8,24.13
  Top 0.762: C36.2 28.82,4.74 28.82,4.41 29.29,3.94 30.99,3.94 32.19,2.73 SV3.1
  Top 0.813: J1.SH6 3.11,24.8 J1.SH5 J1.SH4 1.46,27.64 J1.SH3 1.46,30.07 J1.SH2 3.11,32.8 J1.SH1
  Route2 0.203: v26.67,5.91 26.67,11.2 v26.95,11.48
  Bottom 0.203: U$5.3 19.88,6.14 v19.91,6.17 20.17,5.91 v26.67,5.91 | v13.79,35.01 13.6,35.01 10.94,32.35 LM2901AQT14-13.GND | VR1.3 13.75,23.34 11.26,23.34 11.17,23.43 v11.17,23.6 | VR1.3 14.85,23.06 15.36,23.06 | VR1.3 15.35,22.24 15.35,23.22 15.37,23.22 | 37.08,24.69 v37.05,24.67 | 38.1,24.69 v38.2,24.67 38.1,24.79 | 37.08,23.47 v37.05,23.43 | 38.1,23.47 v38.2,23.43 38.1,23.37 | 37.08,22.25 v37.05,22.19 | 38.1,22.25 v38.2,22.19 38.1,22.35
  Bottom 0.305: U$5.3 9.21,6.14 C4.2
  other vias: 25.72,28.57 25.72,27.43 25.72,26.38 25.72,25.34 25.72,24.38 25.72,23.05 25.72,21.81 26.96,26.77 26.96,25.53 26.96,24.1 48.1,26.48 48.1,25.34 48.1,24.1 38.2,28.19 38.2,26.96 2.55,37.5 47.43,2.92 2.55,37.5 37.05,25.91 38.2,25.91
  pour Top: 35.43,21 35.43,29.24 35.57,29.38 39.62,29.38 39.62,21.15 39.43,20.95 35.53,20.95
  pour Top: 38.86,1.71 44.2,1.71 44.2,15.81 49.43,21.05 49.43,29.91 48.2,29.91 47.72,29.43 47.72,21.24 45.72,19.24 44.32,19.24 38.86,13.78
  pour Top: 27.53,21.05 27.53,29.37 27.28,29.62 25.43,29.62 24.96,29.15 24.96,21.34 25.43,20.86 27.34,20.86
  pour Top (isolate 0.356, rank 6): 0.19,39.81 26.57,39.81 26.57,19.05 29.91,15.72 29.91,14 33.3,10.61 33.3,0.1 0.1,0.1 0.1,39.62
  pour Bottom: 0.19,39.81 26.57,39.81 26.57,19.05 29.91,15.72 29.91,14 33.62,10.29 33.62,0.1 0.1,0.1 0.1,39.62
  pour Route15: 0.19,39.81 26.57,39.81 26.57,19.05 29.91,15.72 29.91,14 33.62,10.29 33.62,0.1 0.1,0.1 0.1,39.62
  pour Top: 44.06,1.84 45.83,0.07 49.93,0.07 49.93,5.79 48.24,7.48 45.38,7.48 44.04,8.82 44.04,1.91 44.02,1.89
  pour Route2: 0,0 50,0 50,26.9 27.8,26.9 26.7,28 26.7,40 0,40 0,0.2
  pour Top: 27.43,21.09 27.43,18.04 27.13,17.74 26.24,17.74 25.62,18.35 25.62,21.51 25.69,21.58 26.1,21.98 26.47,21.98 26.47,21.99
  pour Bottom: 26.33,30.27 27.46,29.14 27.46,26.96 27.69,26.74 35.15,26.74 35.51,27.1 35.51,29.04 35.74,29.27 39.33,29.27 39.53,29.07 39.53,27.09 39.95,26.67 47.52,26.67 47.92,27.07 47.92,29.18 48.61,29.87 48.61,29.91 50.02,29.91 50.02,0.03 49.93,-0.06 33.34,-0.06 33.3,-0.1 33.3,8.89 26.63,15.55 24.53,15.55 24.36,15.72 24.36,21.82
HWB
  Top 0.203: U1.33 16.89,16.7 19.43,14.16 R5.2
M1_CS  (via drill 0.3)
  Top 0.203: U1.36 18.19,18.88 18.42,18.65 18.77,18.65 v19.05,18.37 | v19.34,34.77 19.91,34.77 20.18,34.49 C9.2 21.6,34.01 R21.1
  Route15 0.203: v19.05,18.37 17.81,19.61 17.81,23.05 16.38,24.48 11.89,24.48 11.41,24.96 11.41,25.08 11.05,25.44 11.05,26.77 11.62,27.34 18.01,27.34 18.63,27.96 18.63,29.45 18.49,29.58 18.49,30.32 18.63,30.46 18.63,33.27 18.9,33.55 18.9,34.33 v19.34,34.77
M1_INA  (via drill 0.3)
  Top 0.203: U1.40 19.8,20.88 v20.29,20.39
  Bottom 0.203: v20.29,20.39 27.71,20.39 29.15,21.83 35.03,21.83 35.72,21.14 36.66,21.14 37.23,20.56 37.23,19.63 39.15,17.71 40.86,17.71 41.24,17.34 43.26,17.34 44.05,18.12 R24.2
M1_INB  (via drill 0.3)
  Top 0.203: v20.38,21.3 18.12,21.3 18.1,21.32 17.72,21.32 U1.41
  Bottom 0.203: R25.2 39.31,18.12 37.64,19.8 37.64,20.73 36.83,21.54 35.89,21.54 35.15,22.29 28.96,22.29 27.8,21.13 20.56,21.13 v20.38,21.3
M1_PWM  (via drill 0.3)
  Top 0.203: U1.26 13.39,14.85 v12.31,13.78
  Route2 0.203: v23.53,16.76 14.33,16.76 12.31,14.75 v12.31,13.78
  Bottom 0.203: R20.1 23.91,16.38 v23.53,16.76
M1_SEL  (via drill 0.3)
  Top 0.203: v18.05,23.94 17.77,23.66 U1.1 | v24.28,22.66 24.28,23.55 R22.1
  Bottom 0.203: v18.05,23.94 23,23.94 v24.28,22.66
M2_CS  (via drill 0.3)
  Top 0.203: U1.37 18.26,19.38 18.59,19.06 19.39,19.06 20.25,18.2 v20.25,18.01 | R27.1 20.5,29.5 C10.2 20.33,29.55 19.8,29.55 19.55,29.3 18.61,29.3 v17.83,30.08
  Route15 0.203: v20.25,18.01 20.25,17.97 19.99,17.71 18.78,17.71 17.41,19.09 17.41,22.67 16,24.07 11.72,24.07 11.01,24.79 11.01,24.91 10.64,25.27 10.64,27.22 11.17,27.75 11.66,27.75 11.79,27.88 17.48,27.88 17.83,28.23 v17.83,30.08
M2_INA  (via drill 0.3)
  Top 0.203: v18.86,19.72 18.76,19.72 18.57,19.91 17.69,19.91 U1.38
  Bottom 0.203: R30.2 32.24,16.95 28.48,16.95 26.77,18.67 24.22,18.67 23.81,19.07 22.12,19.07 21.71,18.67 19.91,18.67 v18.86,19.72
M2_INB  (via drill 0.3)
  Top 0.203: v20.38,19.34 20.19,19.34 19.14,20.38 U1.39
  Bottom 0.203: R31.2 28.14,19.53 20.57,19.53 v20.38,19.34
M2_PWM  (via drill 0.3)
  Top 0.203: v17.49,13.78 17.49,14.79 15.89,16.38 U1.31
  Route15 0.203: v17.49,13.78 17.96,13.31 18.69,13.31 21.03,15.65 21.03,16.97 22.45,18.39 23.16,18.39 v23.77,17.78
  Bottom 0.203: v23.77,17.78 24.59,17.78 24.69,17.68 R26.1
M2_SEL  (via drill 0.3)
  Top 0.203: v22.77,17.72 23.18,18.14 R28.1 | v13.1,12.98 13.12,13 13.12,13.46 13.81,14.14 13.81,15.87 13.89,15.95 U1.27
  Bottom 0.203: v13.1,12.98 15.4,12.98 17.28,14.86 19.43,14.86 22.29,17.72 v22.77,17.72
MISO  (via drill 0.3)
  Top 0.203: v9.45,9.35 9.45,4.06 11.79,1.73 SV3.9 | U1.11 11.85,23.69 11.85,23.99 11.01,24.83 11.01,24.91 10.51,25.41 9.15,25.41 8.51,24.77 v8.51,24.53
  Route2 0.203: ICSP.1 2.69,2.66 4.27,2.66 5.03,3.42 5.03,4.05 8.22,7.23 8.22,15.12 7.09,16.24 7.09,23.12 v8.51,24.53
  Route15 0.203: ICSP.1 2.69,2.67 7.43,2.67 8.57,3.81 10.48,3.81 11.87,2.41 SV3.9
  Bottom 0.203: v9.45,9.35 9.35,9.45 9.35,10.57 JMP1.1
MOSI  (via drill 0.3)
  Top 0.203: U1.10 12.4,24.04 11.41,25.02 11.41,25.46 10.92,25.96 8.76,25.96 v8.42,25.62
  Route2 0.203: v8.42,25.62 6.65,23.85 6.65,6.63 ICSP.4
  Route15 0.203: ICSP.4 5.1,3.98 6.12,4.99 11.14,4.99 SV3.8
MOT1_A  (via drill 0.35)
  Top 0.813: U$29.7 U$29.10
  other vias: 45.24,32.1 46.1,31.15 47.53,31.15 48.39,32.1 44.96,38 46.48,38 48.29,38 48.48,35.72
  pour Top: 47.34,27.15 47.34,29.62 49.36,31.65 49.36,38.67 44.29,38.67 44.29,31.53 46.2,29.62 46.2,27.15
  pour Bottom: 46.21,27.08 46.21,29.61 44.29,31.52 44.29,38.64 44.31,38.66 49.36,38.66 49.37,38.65 49.37,31.67 47.32,29.62 47.34,29.6 47.34,27.05
MOT1_B  (via drill 0.35)
  Top 0.813: U$29.2 U$29.15
  other vias: 39.91,31.05 41.24,31.05 39.34,32.1 41.91,32 39.53,37.91 41.24,37.91 42.86,37.91 43.05,35.81 39.53,35.72
  pour Top: 39.91,27.31 40.96,27.31 40.96,29.78 43.88,32.7 43.88,38.67 38.57,38.67 38.57,31.16 39.91,29.81
  pour Bottom: 39.91,27.18 39.91,29.81 38.57,31.15 38.57,38.66 38.57,38.67 43.86,38.67 43.87,38.65 43.87,32.7 40.96,29.79 40.96,27.19 40.97,27.18 39.91,27.18
MOT2_A  (via drill 0.35)
  Top 0.813: U$32.7 U$32.10
  other vias: 36.2,31.72 35.43,30.77 33.81,31.72 34.39,30.77 33.91,37.91 35.43,37.91 37.15,37.91 37.24,35.43 33.81,35.43
  pour Top: 34.1,27.15 35.05,27.15 35.05,29.24 38.2,32.38 38.2,38.67 33.24,38.67 33.24,30.29 34.1,29.43
  pour Bottom: 34.08,27.13 34.08,29.45 33.25,30.27 33.25,38.66 33.25,38.67 38.2,38.67 38.2,32.4 35.04,29.25 35.04,27.15
MOT2_B  (via drill 0.35)
  Top 0.813: U$32.2 U$32.15
  other vias: 28.08,30.74 29.13,30.74 27.6,31.59 29.79,31.59 31.98,37.79 29.32,37.79 30.56,37.79 32.27,35.59 28.46,35.59
  pour Top: 27.81,27.15 28.77,27.15 28.77,29.24 32.96,33.43 32.96,38.67 28,38.67 28,35.53 26.96,34.48 26.96,30.67 27.81,29.81
  pour Bottom: 27.83,27.16 27.83,29.58 26.97,30.45 26.97,34.48 27.94,35.46 27.94,38.68 32.92,38.68 32.94,38.65 32.94,33.44 28.77,29.27 28.77,27.17 28.78,27.16
N$1  (via drill 0.3)
  Top 0.203: LED.A 45.89,10.38 v44.96,10.38
  Bottom 0.203: R1.2 45.03,10.31 v44.96,10.38
N$2  (via drill 0.35)
  Route15 0.203: v10.09,31.18 10.48,31.57 14.55,31.57 15.97,32.99 v16.28,32.99
  Bottom 0.203: 16.32,32.9 17.61,31.6 RN3.2 | 16.32,32.9 16.17,33.05 RN1.3 | LM2901AQT14-13.3IN+ 9.36,30.45 v10.09,31.18 | v16.28,32.99 16.32,32.95 16.32,32.9
N$3
  Bottom 0.203: 18.26,30.8 RN3.1 18.23,31.05 17.25,31.05 15.37,32.93 RN1.4 15.17,34.08 13.24,34.08 11.08,31.92 9.23,31.92 9.03,31.72 LM2901AQT14-13.4IN+
N$4  (via drill 0.3)
  Top 0.203: ON.A 45.78,15.78 v44.91,15.78
  Bottom 0.203: R3.2 46.22,15.78 v44.91,15.78
N$5  (via drill 0.3)
  Top 0.203: RX.A v44.97,12.3 v44.96,12.29
  Bottom 0.203: v44.96,12.29 46.31,12.29 R6.2
N$6  (via drill 0.3)
  Top 0.203: TX.A 45.96,14.1 v44.96,14.1
  Bottom 0.203: v44.96,14.1 46.31,14.1 R7.2
N$7  (via drill 0.35)
  Top 0.203: U$29.13 42.99,29.67 v43.47,30.15 | v24.39,32.03 24.11,32.32 23.41,32.32 R23.2 22.95,32.78 R21.2
  Route15 0.203: 24.46,31.97 v24.39,32.03 25.38,33.02 25.38,35.48 27.43,37.53 27.43,38.86 27.96,39.39 43.57,39.39 44.22,38.74 44.22,30.86 43.51,30.15 v43.47,30.15
N$8  (via drill 0.35)
  Top 0.203: U$29.14 41.75,28.37 41.77,28.37 42.03,28.63 v42.03,29.95 | v25.45,31.28 25.45,30.03 24.44,29.02 24.44,25.01 R22.2
  Route15 0.203: v25.45,31.28 25.45,32.21 25.79,32.55 25.79,35.32 27.98,37.51 27.98,38.65 28.32,38.98 43.31,38.98 43.81,38.48 43.81,31.73 v42.03,29.95
N$9  (via drill 0.3)
  Top 0.203: U$29.11 45.53,29.15 v44.67,30
  Route15 0.203: v36.39,20.48 37.05,21.14 38.59,21.14 43.62,26.17 43.62,29.04 44.59,30 v44.67,30
  Bottom 0.203: v36.39,20.48 36.2,20.48 35.9,20.18 35.9,19.44 34.57,18.11 34.57,17.48 34.15,17.06 33.5,17.06 32.58,16.14 28.14,16.14 27.9,16.38 R20.2
N$10  (via drill 0.35)
  Top 0.203: U$29.6 v45.53,20.57
  Bottom 0.203: v45.53,20.57 45.53,19.47 R24.1
N$11  (via drill 0.35)
  Top 0.203: U$29.3 41.72,21.53 40.77,20.57 v40.77,20.48
  Bottom 0.203: v40.77,20.48 41.8,19.45 R25.1
N$12  (via drill 0.35)
  Top 0.203: U$32.13 30.86,29.53 v31.72,30.39 | v24.57,30.57 23.34,30.57 R29.2 23.17,30.75 R27.2
  Route15 0.203: v24.57,30.57 25.71,30.57 26.19,31.06 26.19,35.15 28.48,37.43 28.48,38.29 28.77,38.58 32.67,38.58 33.05,38.2 33.05,31.72 v31.72,30.39
N$13  (via drill 0.35)
  Top 0.203: U$32.14 29.59,29.23 v30.36,30 | R28.2 23.18,25.74 v23.16,25.76
  Route15 0.203: v23.16,25.76 24.42,27.02 24.42,29.01 25.43,30.02 30.34,30.02 v30.36,30
N$14  (via drill 0.3)
  Top 0.203: v32.77,29.91 33.4,29.27 U$32.11
  Route15 0.203: v34.96,20.48 34.78,20.48 32.77,22.49 v32.77,29.91
  Bottom 0.203: v34.96,20.48 34.96,19.24 34.16,18.45 34.16,17.64 33.98,17.47 33.33,17.47 32.41,16.55 28.31,16.55 27.24,17.62 R26.2
N$15  (via drill 0.35)
  Top 0.203: U$32.6 33.4,20.7 v33.43,20.67
  Bottom 0.203: v33.43,20.67 33.43,19.45 R30.1
N$16  (via drill 0.35)
  Top 0.203: U$32.3 29.62,22.17 v29.62,20.57
  Bottom 0.203: v29.62,20.57 29.62,19.31 R31.1
N$17
  Top 0.305: C37.2 26.99,8.63 27.06,8.56 U$3.10
N$18
  Top 0.203: U$3.11 27.43,8.03 27.43,7.62 U$3.12
  Top 0.305: C37.1 27.22,7.33 U$3.12
  Top 0.508: L8.2 25.99,6.86 C37.1
N$19
  Top 0.305: U$3.5 29.6,11.41 C39.1
N$20
  Top 0.279: U$3.2 31.22,8.06
  Top 0.305: 31.22,8.06 C40.1
N$21  (via drill 0.3)
  Top 0.203: v18.45,14.02 18.1,14.37 18.1,14.75 16.39,16.46 U1.32
  Bottom 0.203: R1.1 48.25,9.6 47.68,9.02 23.83,9.02 18.83,14.02 v18.45,14.02
N$22  (via drill 0.35)
  Route2 0.203: v15.89,30.39 17.21,30.39 17.56,30.74 20.41,30.74 v23.88,34.2
  Route15 0.203: v11.38,28.43 13.04,28.43 13.21,28.61 v13.21,28.63 | v23.88,34.2 24.42,33.66 24.42,33.3 23.3,32.17 T.1
  Bottom 0.203: LM2901AQT14-13.2IN- 12.83,31.72 12.69,31.58 12.69,30.54 12.78,30.45 13.03,30.45 | 13.03,30.45 LM2901AQT14-13.1IN- 13.91,30.4 v15.88,30.4 v15.89,30.39 16.13,30.15 16.13,23.32 15.76,22.95 15.76,21.52 15.44,21.2 14.01,21.2 13.73,20.91 13.73,19.74 14.13,19.34 16.2,19.34 VR1.2 | LM2901AQT14-13.4IN- 8.41,31.1 8,31.1 7.61,30.71 7.61,30 7.79,29.81 LM2901AQT14-13.3IN- 10,29.81 v11.38,28.43 | v13.21,28.63 13.06,28.78 13.06,30.41 13.03,30.45
N$23
  Top 0.203: L2.1 11.05,30.77 D3.3
N$24  (via drill 0.3)
  Top 0.203: R2.2 15.82,11.63 v15.62,11.43 | JP5.1 1.5,18.38 2.59,19.47 4.46,19.47 5.2,18.74 5.2,17.31 5.81,16.7 5.81,16.01 5.82,16.01 5.82,15.62 v7.39,14.04
  Top 0.305: R8.1 15.86,12.48 R2.2
  Route15 0.203: v15.62,11.43 14.08,9.89 9.97,9.89 7.42,12.45 7.42,14.04 v7.39,14.04
N$25  (via drill 0.3)
  Top 0.203: v12.04,11.14 12.21,11.3 13.03,11.3 13.24,11.52 15.54,13.82 15.75,13.82 R2.1
  Bottom 0.203: v12.04,11.14 10.66,11.14 10.2,11.61 9.72,11.61 JMP1.2
N$27  (via drill 0.35)
  Route15 0.203: v15.22,31.08 15.33,31.08 17.24,32.98 v17.24,33.23
  Bottom 0.203: 16.97,33.75 RN1.2 16.97,33.48 17.22,33.23 v17.24,33.23 17.26,33.23 18.09,32.4 RN3.3 | 14.31,31.08 LM2901AQT14-13.2IN+ v15.22,31.08
N$28  (via drill 0.35)
  Route15 0.203: v14.18,28.57 15.21,28.57 18.22,31.59 v18.22,33.83
  Bottom 0.203: RN3.4 18.47,33.59 v18.22,33.83 RN1.1 | LM2901AQT14-13.1IN+ 13.86,28.93 14.18,28.62 v14.18,28.57
N$29
  Top 0.203: U1.17 10.15,20.38 9.91,20.62 9.37,20.62 8.95,20.2 8.95,18.94 8.51,18.5 8.51,18.37 | 8.51,18.37 8.26,18.12 7.94,18.12 U$1.IN | 8.51,18.37 8.51,17.99
N$30
  Top 0.203: 8.41,20.49 U$1.OUT 7.91,20.99 8.18,21.26 8.7,21.26 8.78,21.17 9.93,21.17 10.23,20.88 U1.16
RD+
  Top 0.203: R10.2 10.09,28.8 10.77,29.49 14.25,29.49 15.49,28.24 15.49,27.27 16.06,26.7 16.06,25.8 15.49,25.22 15.49,24.17 15.39,24.07 U1.4
RD-
  Top 0.203: R9.2 10.31,29.92 14.38,29.92 15.9,28.41 15.9,27.43 16.47,26.87 16.47,25.63 15.9,25.06 15.9,23.67 U1.3
RESET  (via drill 0.3)
  Top 0.203: 5.24,21.75 5.22,21.75 | 5.22,21.75 RESET.1 4.86,21.69 | R4.1 6.68,22.17 | v5.22,23.69 5.22,22.14 | 5.22,22.14 5.22,21.75 | U1.13 10.73,22.38 10.14,22.98 10.14,23.58 9.93,23.79 7.79,23.79 6.68,22.69 R4.1 | R4.1 6.68,22.2 | R4.1 5.29,22.07 5.22,22.14
  Bottom 0.203: ICSP.5 6.54,2.45 5.46,3.53 5.46,7.81 2.97,10.3 2.97,13.72 3.6,14.35 5.14,14.35 6.13,15.34 6.13,17.77 6.76,18.4 6.76,19.31 8,20.55 8,22.95 7.27,23.69 v5.22,23.69
RESET-WIFI
  Top 0.203: RESET1.1 0.8,9.93 0.38,10.35 0.38,14.19 0.84,14.66 2.13,14.66 3.29,15.82 3.35,15.85 3.96,15.85 JP5.4
RX  (via drill 0.35)
  Top 0.203: U1.30 15.39,15.91 v15.89,15.41
  Route2 0.203: v15.89,15.41 15.89,12.62 14.96,11.7 14.96,8.26 15.27,7.95 15.27,5.94 SV3.6
RXLED  (via drill 0.3)
  Top 0.203: RX.C 49.14,11.21 49.14,7.88 v49.05,7.8 | 13.39,24.04 U1.8 13.39,24.32 12.68,25.02 12.56,25.02 12.23,25.36 12.23,25.94 11.82,26.35 11.82,26.53 v11.87,26.57
  Route15 0.203: v49.05,7.8 38.48,7.8 30.77,15.52 30.77,16.38 26.67,20.48 23.24,20.48 21.81,21.91 21.81,24.38 19.27,26.93 18.62,26.93 12.22,26.93 v11.87,26.57
SCK  (via drill 0.3)
  Top 0.203: U1.9 12.88,24.25 12.52,24.62 12.39,24.62 11.82,25.19 11.82,25.69 10.87,26.64 9.36,26.64 v9.34,26.63
  Route2 0.203: ICSP.3 5.52,2.96 6.96,2.96 8.67,4.66 8.67,15.29 7.54,16.41 7.54,22.42 9.23,24.11 9.23,26.55 9.31,26.63 v9.34,26.63 9.24,26.53
  Route15 0.203: ICSP.3 4.28,1.44 5.32,0.4 15.64,0.4 SV3.7
SCL  (via drill 0.35)
  Top 0.203: SV3.4 24.36,1.71 | U1.18 9.68,19.88 v9.65,19.92
  Route2 0.203: v9.65,19.92 9.94,19.63 10.87,18.7 10.87,15.27 10.62,15.02 10.62,13.54 10.16,13.09 10.16,11.38 v14.41,7.13
  Route15 0.203: v14.41,7.13 18.21,3.33 21.93,3.33 23.54,1.71 SV3.4
SDA  (via drill 0.35)
  Top 0.203: U1.19 10.58,19.38 9.02,17.82 9.02,17.35 | 9.02,17.25 9.02,17.35 | v8.92,16.57 8.92,17 8.94,17.02 8.94,17.27 9.02,17.35
  Route2 0.203: v16.1,8.94 16.1,8.08 20.45,3.73 26.3,3.73 27.11,2.92 SV3.3
  Route15 0.203: v16.1,8.94 9.97,8.94 9.72,8.69 9.18,8.69 6.2,11.67 6.2,13.5 6.51,13.81 6.51,15 7.14,15.63 7.99,15.63 v8.92,16.57
TX  (via drill 0.35)
  Top 0.203: U1.25 12.89,16.43 v12.01,15.55
  Route15 0.203: v10.84,12.8 10.84,14.16 10.65,14.35 10.65,14.89 11.04,15.28 11.74,15.28 v12.01,15.55
  Bottom 0.203: SV3.5 23.88,3.56 25.3,3.56 27.33,5.59 27.33,6.2 26.92,6.6 21.84,6.6 17.48,10.97 16.46,10.97 16.26,10.77 13.51,10.77 12.45,11.83 11.81,11.83 v10.84,12.8 9.73,13.92 9.35,13.92 JMP1.3
TXLED  (via drill 0.3)
  Top 0.203: TX.C 48.86,14.19 49.18,13.86 v49.18,13.27 | v10.16,15.87 10.57,15.87 11.2,16.5 11.2,17.09 11.38,17.27 11.38,17.61 U1.22
  Bottom 0.203: v49.18,13.27 49.18,9.95 47.84,8.62 23.57,8.62 19.9,12.28 12.36,12.28 10.64,14.01 10.64,15.11 10.16,15.59 v10.16,15.87
UCAP
  Top 0.203: C7.1 14.39,25.22
  Top 0.305: 14.39,25.22 U1.6
VIN
  Top 0.203: U$32.5 32.13,18.18 C12.+ 42.99,21.19 U$29.4 | U$32.4 U$32.5 | U$32.12 U$32.5 | POWER.1 36.58,14.28 36.61,14.31 | U$29.5 U$29.12 | C36.1 29.5,5.95 29.5,6.51 | 29.5,6.91 29.5,6.51 | U$3.15 29.5,6.51 | C36.1 30.05,5.6 30.6,6.15 30.6,6.82 30.43,6.99 30.3,6.86 30.43,6.73 | 30.43,6.73 | 30.43,6.73 30.48,6.69 30.48,6.07 | C36.1 30.05,5.73 29.62,6.16
  Top 0.279: U$3.15 29.5,6.91 U$3.16 | 30.25,7.32 30.25,7.36 U$3.1
  Top 0.305: U$3.16 29.84,6.91 30.25,7.32 | 30.25,7.36 30.34,7.45 30.34,5.43 | C36.1 30.05,5.43
  Top 0.762: POWER.1 33.01,4.33 31.91,5.43 30.34,5.43 30.05,5.43
  pour Top: 33.91,1.71 38.2,1.71 38.2,14.95 32.48,20.67 32.48,29.42 31.8,29.42 31.8,28.97 31.81,28.96 31.81,27.24 30.48,25.91 30.48,14.21 33.91,10.78
  pour Top: 38.04,13.63 44.67,20.26 44.67,29.43 43.91,29.43 43.91,27.34 42.58,26 42.58,21.24 41.15,19.81 32.96,19.81 32.96,14.95 34.29,13.62 38.02,13.62
  pour Top (rank 2): 29.58,5.93 29.58,5.79 30.11,5.26 30.74,5.26 31.04,5.55
  pour Top: 29.52,6.14 29.52,6.51 29.19,6.83 29.28,6.93 29.81,6.93 30.25,7.36 30.25,7.47 30.36,7.47 30.36,6
VUSB  (via drill 0.35)
  Top 0.203: U$6.2 5.89,32.5 7.78,34.38 C2.1 10.05,34.38 D3.2 10.1,34.55 9.51,35.14 v9.13,35.14 | C13.2 13.41,26.15 13.66,26.15 13.73,26.21 14.94,26.21 v14.97,26.25 | v5.89,18.52 5.89,17.64 6.22,17.31 v8.25,17.31 v8.26,17.3
  Top 0.279: C13.2 13.06,25.6 13.29,25.37 13.29,25.04 13.89,24.45 U1.7
  Route2 0.203: v14.97,26.25 14.95,26.25 14.89,26.19 13.08,26.19 12.81,25.92 10.65,25.92 9.64,24.91 9.64,23.82 8.26,22.44 v8.26,17.3
  Route15 0.203: v9.13,35.14 8.32,35.14 5.08,31.9 5.08,25.03 5.19,24.92 5.19,24.6 4.29,23.7 4.29,19.69 5.1,18.87 5.54,18.87 v5.89,18.52
XUSB
  Top 0.203: J1.1 4.2,30.16 4.56,30.16 5.84,31.45 U$6.1

## Text on the board
tPlace: GEMINI | C:/Users/franc/Desktop/palloncino.bmp | C:/Users/franc/Desktop/palloncino.bmp
bPlace: GEMINI | + | - | C:/Users/franc/Desktop/palloncino.bmp
tNames: S2 | S1 | 5V | GND | S2 | S1 | 5V | GND | MOTOR 2 | MOTOR 1 | WIFI | ON | TX | RX | 13 | 5V | GND | 3.3V | MISO | MOSI | SCK | RX | TX | SCL | SDA
bNames: OPEN-HARDWARE PLATFORM
tStop: C:/Users/franc/Desktop/palloncino.bmp
bStop: desigened by S.D/F.B/L.V | designed by S.D/F.B/L.V